# Altium PCB JFETSOT23_DCBias.PcbDoc
Units mm, origin at the board's own origin, x right, y up, seen from the top; angles counter-clockwise.
Board outline 40.01 x 8 mm, 2 copper layers (Top Layer, Bottom Layer); 8 components, 5 nets, 20 pads, 6 vias.
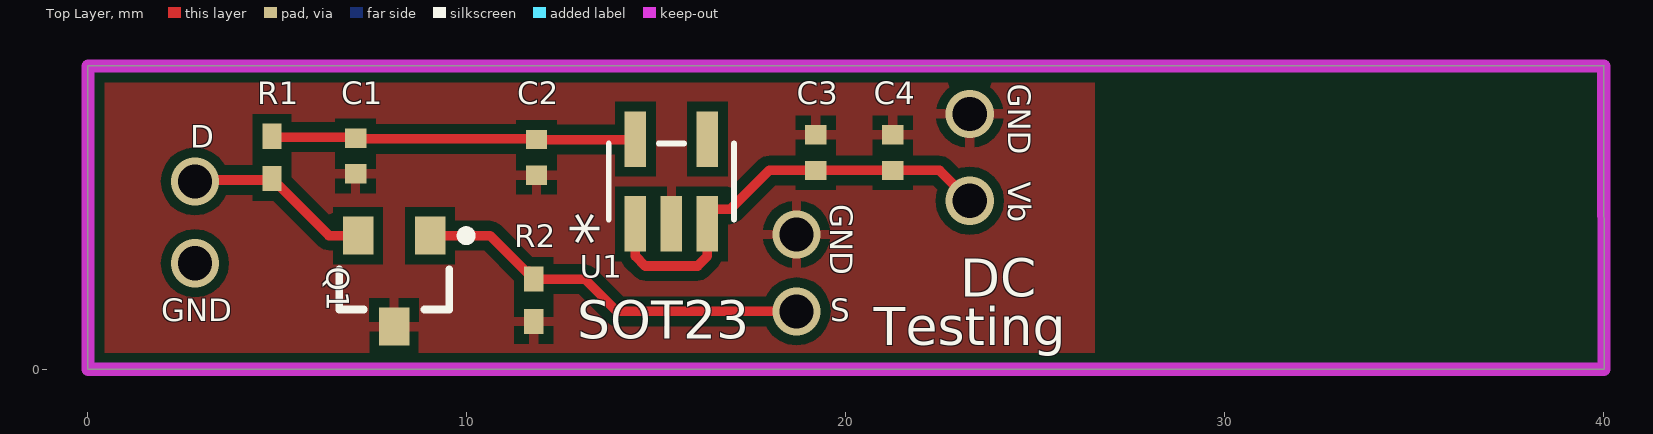
[diagram p0: Top Layer view]
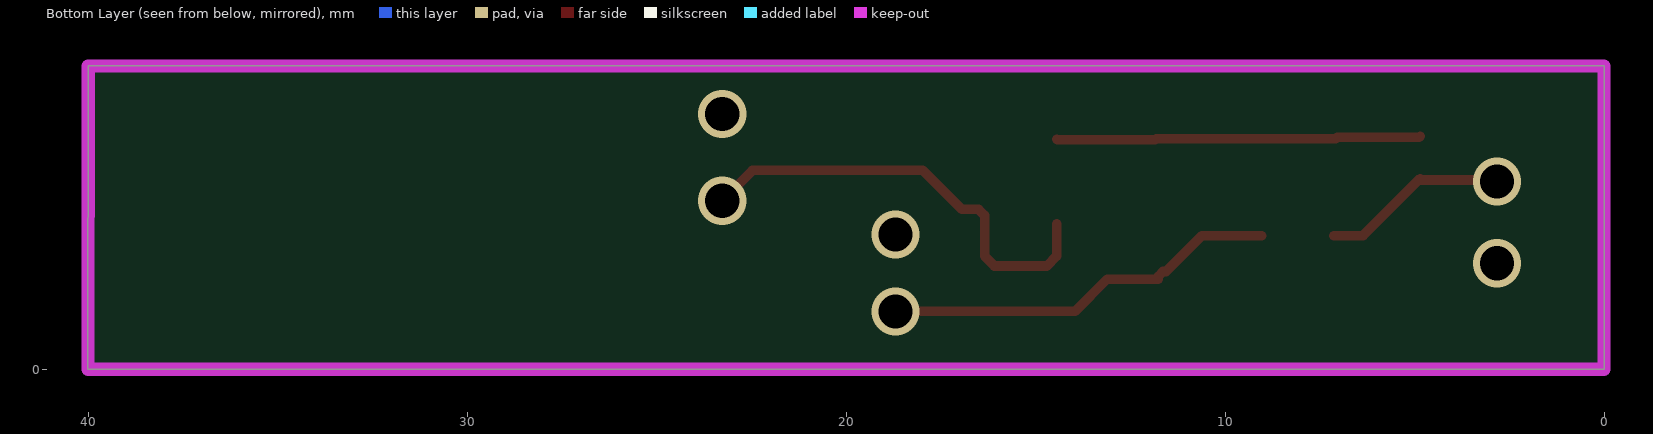
[diagram p1: Bottom Layer view, seen from below]

## Layer stack, top to bottom
Top Solder: solder mask 0.0102, Solder Resist, Dk 3.5
Top Layer: signal copper 0.0356
Dielectric 1: dielectric 0.32, FR-4, Dk 4.8
Bottom Layer: signal copper 0.0356
Bottom Solder: solder mask 0.0102, Solder Resist, Dk 3.5

## Board outline
0,0 40.005,0 40,8 0,8

## Design rules (kind name [scope] priority, off if disabled: settings)
Clearance [All] p1: gap=0.254 ignorepadtopadclearanceinfootprint=FALSE except(0: Arc-Hole Track-Hole SMDPad-Hole THPad-Hole Via-Hole Fill-Hole Poly-Hole Region-Hole Text-Hole)
PolygonConnect [All] p1: connectstyle=Relief reliefconductorwidth=0.254 reliefentries=4 polygonreliefangle="90 Angle" airgapwidth=0.254
RoomDefinition JFETSOT23_DCBias [InComponentClass('JFETSOT23_DCBias')] p1: confinementstyle=ConfineIn formatcopy=TRUE lockcomponents=FALSE outline 0,0 40.005,0 40.005,8 0,8
RoutingVias [All] p1: holewidth=0.711 width=1.27 viastyle="Through Hole" minholewidth=0.711 minwidth=1.27 maxholewidth=0.711 maxwidth=1.27
SolderMaskExpansion [All] p1: expansion=0.102
Width [All] p1: maxlimit=0.254 minlimit=0.254 preferedwidth=0.254
30 further rules are at their usual default settings.

## Components (designator, comment, footprint, x,y, rotation, side; value= is the part's Value field where it differs from the comment)
C1 "" YAG_CC0402 7.064,5.626 r90 top value=Value
C2 "" YAG_CC0402 11.839,5.587 r90 top value=Value
C3 "" YAG_CC0402 19.205,5.714 r270 top value=Value
C4 "" YAG_CC0402 21.237,5.714 r270 top value=Value
Q1 "" ONSC-CP-3-318AN_A_V 8.08,2.324 r270 top
R1 "" RC0402N 4.854,5.587 r270 top value=Value
R2 "" RC0402N 11.763,1.816 r270 top value=Value
U1 "" DBV5 15.395,4.952 r90 top value=Value

## Footprints (in the part's own frame and the unit in brackets; to place one, negate y for a bottom-side part, rotate by r counter-clockwise, add the part's x,y. Pads: shape width x height; smd on the part's side, far side on the other; paste and mask are expansions set on the pad)
DBV5 [mil]
  rect 57.56x22.36 smd paste+0 mask+0: 1(-44,37.4) 2(-44,0) 3(-44,-37.4) 4(44,-37.4) 5(44,37.4)
  silkscreen extent -40,-65 40,65, body extent 0,0 10,10, height 10
ONSC-CP-3-318AN_A_V [mm] "SOT23, 3-Leads, Body 2.9x1.5mm, Pitch 0.95mm"
  rect 1x0.8 smd: 1(-1.2,0.95) 2(-1.2,-0.95) 3(1.2,0)
  silkscreen extent -1.32,-1.45 0.75,2.02, body extent -0.75,-1.45 0.75,1.45, height 1.31
RC0402N [mil]
  rect 26x20 smd: 1(-22,0) 2(22,0)
  body extent 0,0 10,10, height 10
YAG_CC0402 [mil]
  rect 20x22 smd paste+0 mask+0: 1(-18.5,0) 2(18.5,0)
  body extent 0,0 10,10, height 10

## Part data
C1 C2 C3 C4: library part CC0402KRX7R9BB10, "No Description Available", Manufacturer_Part_Number=CC0402KRX7R9BB103, Built_By=EMA_UL_Team, Copyright="Copyright (C) 2018 Accelerated Designs. All rights reserved", RefDes=RefDes, Type=DEV, Vendor=Yageo
Q1: library part 2SK2394-6-TB-E, "N-Channel JFET, 15 V, 10 to 20 mA, 38 mS, 3-Pin CP, Pb-Free, Tape and Reel", Manufacturer="On Semiconductor", Supplier Part Number 1=2SK2394-6-TB-E-ND, Channel Polarity="N Channel", ComponentLink1Description="Manufacturer URL", ComponentLink1URL=http://www.onsemi.com/, ComponentLink2Description=Datasheet, ComponentLink2URL=http://www.onsemi.com/pub_link/Collateral/EN4839-D.PDF, ComponentLink3Description="Package Specification", ComponentLink3URL=http://www.onsemi.com/pub_link/Collateral/EN6619-D.PDF, IDSS Max (uA)=20000, IDSS Min (uA)=10000, Mounting Technology="Surface Mount", PackageDescription="3-Pin Small Outline Transistor, Body 2.9 x 1.5 mm, Pitch 0.95 mm", PackageReference=CP-3-318AN_A, Packing="Tape and Reel", PartNumber=2SK2394-6-TB-E, RoHS=Pb-Free, Supplier 1=Digi-Key, Supplier 2=Mouser, Supplier Part Number 2=863-2SK2394-6-TB-E
R1 R2: library part RC0402JR-070RL, "No Description Available", Built_By=EMA_UL_Team, Copyright="Copyright (C) 2018 Accelerated Designs. All rights reserved", Manufacturer_Part_Number=RC0402JR-070RL, RefDes=RefDes, Type=DEV, Vendor=Yageo
U1: library part LP5907MFX-3.3/NO, "No Description Available", Manufacturer_Part_Number=LP5907MFX-3.3/NOPB, Built_By=EMA_UL_Team, Copyright="Copyright (C) 2018 Accelerated Designs. All rights reserved", RefDes=RefDes, Type=DEV, Vendor="Texas Instruments"

## Via types
v1: diameter 1.27, hole 0.9, Top Layer to Bottom Layer, 6 vias

## Nets (pads, with @x,y where several pads share a name; then routed paths per layer and width w, separated by ;. In a path a pad name is that pad's centre, name@x,y a point inside that pad or via, vN(x,y) a via of type N, cw(c..) or ccw(c..) an arc to the next point about the centre after c; other vN are vias at no path point)
D: Q1.2 R1.2 | length 5
  Top Layer w0.254: v1(2.822,4.952) 2.86,4.991 4.816,4.991 R1.2 6.359,3.524 Q1.2
GND: C1.1 C2.1 C3.1 C4.1 Q1.3 R2.2 U1.2
  other v1: 18.697,3.555 23.269,6.73
S: Q1.1 R2.1 | length 10.5
  Top Layer w0.254: Q1.1 10.614,3.524 11.56,2.578 11.636,2.578 11.763,2.451 R2.1 13.109,2.374 13.96,1.523 v1(18.697,1.523)
Vbatt: C3.2 C4.2 U1.1 U1.3 | length 11.9
  Top Layer w0.254: U1.1 14.445,2.982 14.704,2.723 16.086,2.723 16.345,2.982 U1.3 ; U1.3@16.345,3.708 16.345,4.059 16.502,4.216 16.944,4.216 17.973,5.245 C3.2 C4.2 22.469,5.245 v1(23.269,4.444)
Vcc: C1.2 C2.2 R1.1 U1.5 | length 9.6
  Top Layer w0.254: R1.1 4.879,6.121 7.038,6.121 C1.2 7.083,6.076 11.82,6.076 C2.2 14.432,6.057 U1.5
pads on no net: U1.4
copper on no net:
  other v1: 2.822,2.793

## Polygon pours and split planes (outlines as drawn)
GND on Top Layer "Top Layer-GND" (solid, pour order 0): 0.028,7.873 0.155,8 26.444,8 26.571,7.873 26.571,0.126 26.444,-0.001 0.155,-0.001 0.028,0.126

## Keep-outs
Keep-Out Layer:
  the board outline again, w0.35

## Silkscreen, mask and mechanical layers (free items; w line width, h text height)
Top Overlay:
  text "GND" at 24.285,7.53 h0.6 r270
  text "D" at 2.695,5.841 h0.6
  text "Vb" at 24.285,4.944 h0.6 r270
  text "GND" at 19.586,4.355 h0.6 r270
  text "DC" at 23.015,1.904 h1
  text "GND" at 1.933,1.269 h0.6
  text "S" at 19.586,1.269 h0.6
  text "SOT23" at 12.906,0.8 h1
  text "Testing" at 20.729,0.634 h1

## Text inside footprints (layer, text, board x,y; h text height)
U1: Top Overlay "*" at 14.004,3.263 h1.27 r90; Mechanical 13 "*" at 14.969,4.013 h1.27 r90